# Altium PCB ESP_Layout_2.0.PcbDoc
Units mil, origin at the board's own origin, x right, y up, seen from the top; angles counter-clockwise.
Board outline 3640 x 2300 mil, 2 copper layers (Top Layer, Bottom Layer); 39 components, 25 nets, 166 pads, 23 vias.
Unrouted connection lines stored in the file: 41.
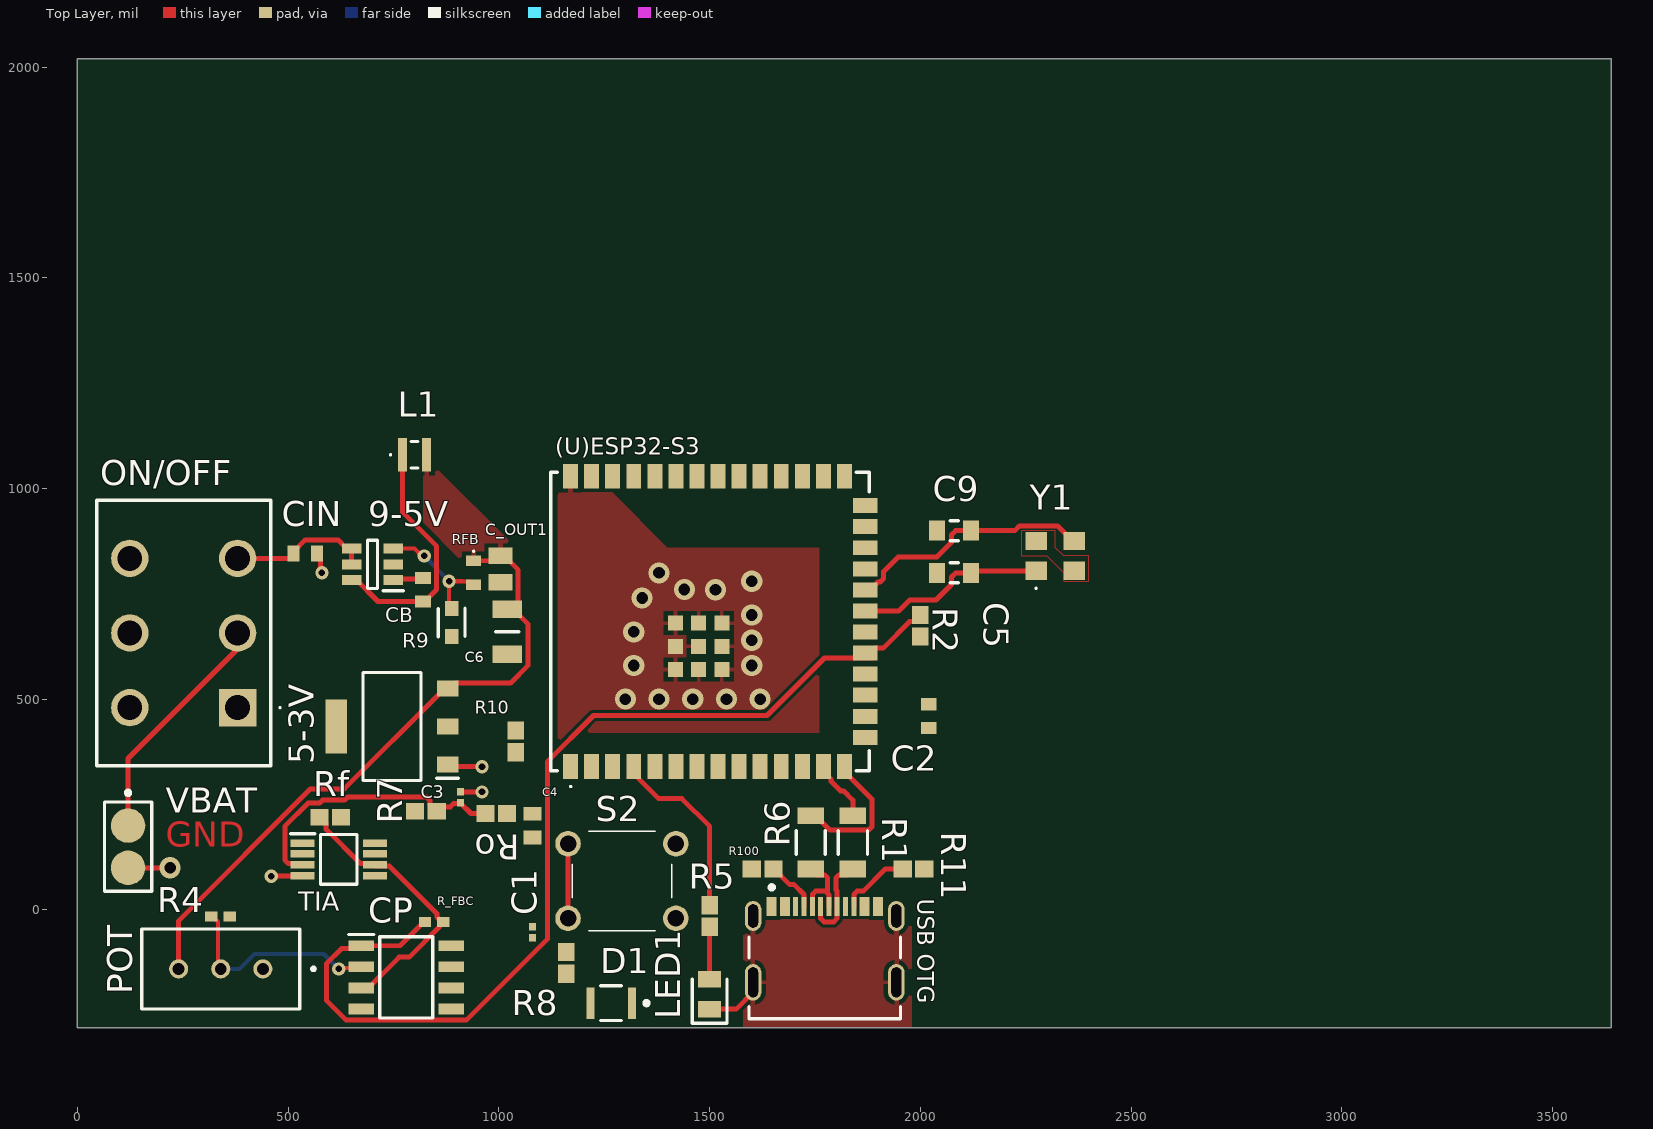
[diagram p0: Top Layer view]
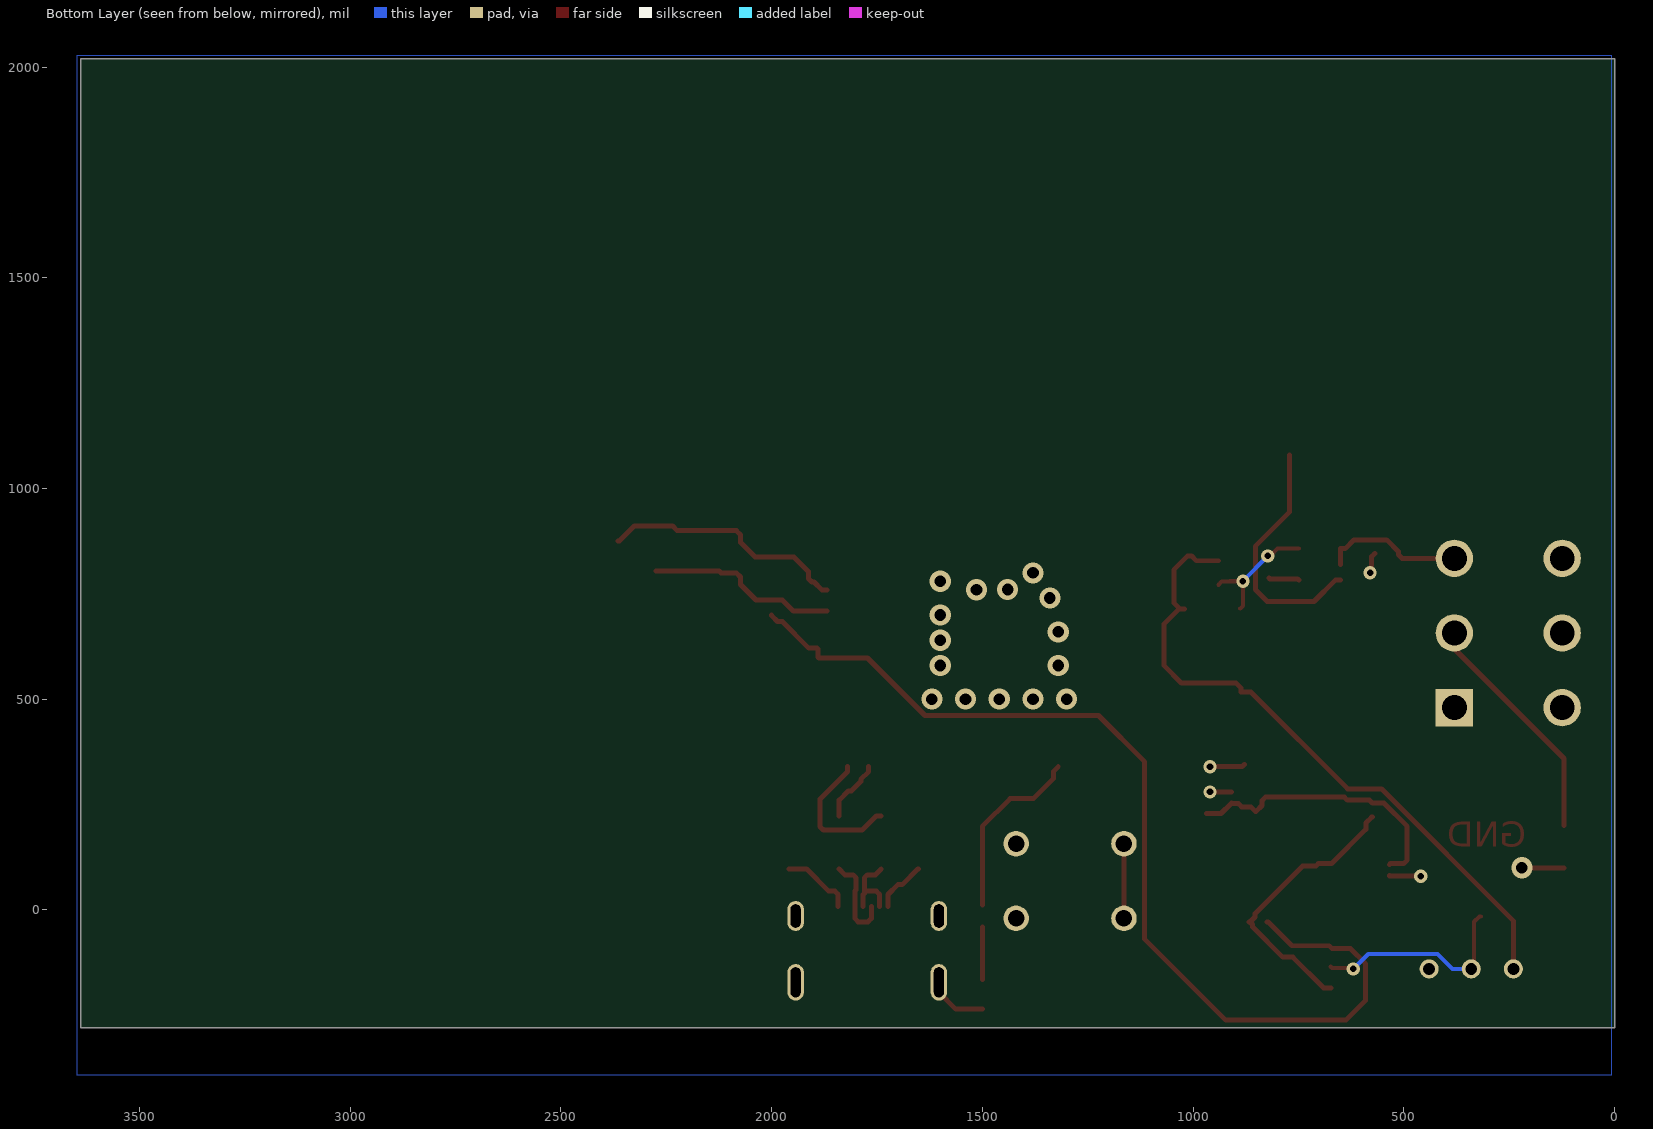
[diagram p1: Bottom Layer view, seen from below]
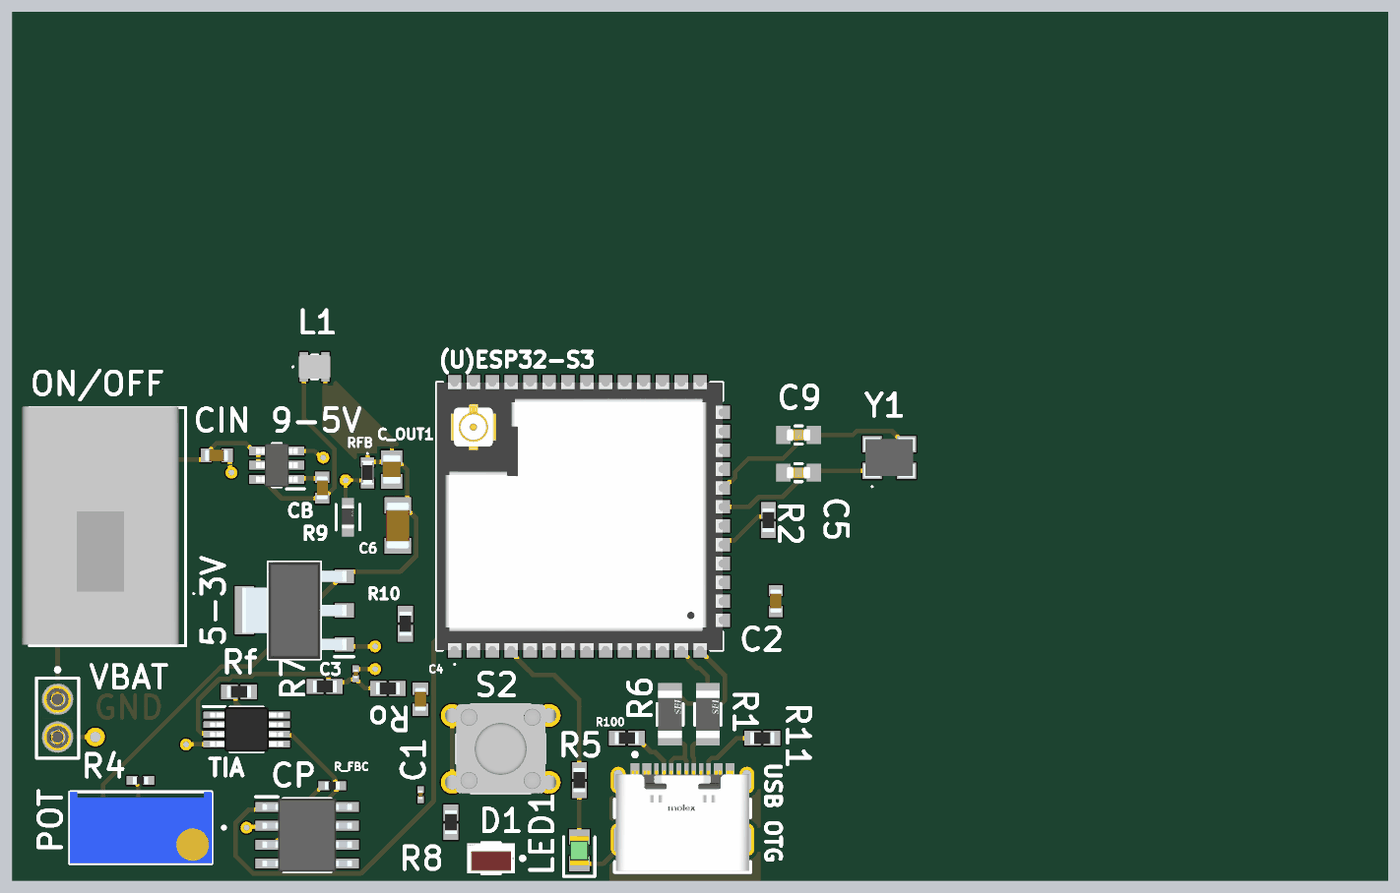
[diagram p2: 3D render of the assembled board from above, using the file's embedded part models]

## Layer stack, top to bottom
Top Solder: solder mask 0.4, Solder Resist, Dk 3.5
Top Layer: signal copper 1.4
Dielectric 1: dielectric 12.6, FR-4, Dk 4.8
Bottom Layer: signal copper 1.4
Bottom Solder: solder mask 0.4, Solder Resist, Dk 3.5

## Board outline
0,-280 0,2020 3640,2020 3640,-280

## Design rules (kind name [scope] priority, off if disabled: settings)
Clearance [All] p1: gap=7.87 ignorepadtopadclearanceinfootprint=FALSE
DiffPairsRouting [All] p1: maxlimit=10 minlimit=5.91 mostfreqgap=10 toplayer_minwidth=5.91 toplayer_maxwidth=19.68 toplayer_prefwidth=15 bottomlayer_mingap=5.91 bottomlayer_minwidth=5.91 bottomlayer_maxwidth=19.68 bottomlayer_prefwidth=15 maxuncoupledlength=500
HoleSize [All] p1: absolutevalues=TRUE maxlimit=196.85 minlimit=11.81 maxpercent=80.000 minpercent=20.000
MinimumSolderMaskSliver [All] p1: minsoldermaskwidth=4
PolygonConnect [All] p1: thpad.connectstyle=Relief thpad.reliefconductorwidth=10 thpad.reliefentries=4 thpad.polygonreliefangle="90 Angle" thpad.airgapwidth=10 smdpad.connectstyle=Relief smdpad.reliefconductorwidth=10 smdpad.reliefentries=4 smdpad.polygonreliefangle="90 Angle" smdpad.airgapwidth=10 via.connectstyle=Direct via.reliefconductorwidth=10 via.reliefentries=4 via.polygonreliefangle="90 Angle" via.airgapwidth=10
RoutingVias [All] p1: holewidth=15.75 width=31.5 viastyle="Through Hole" minholewidth=11.81 minwidth=27.56 maxholewidth=27.56 maxwidth=39.37
SilkToSolderMaskClearance [IsPad] p1: minsilkscreentomaskgap=5.91 clearancetoexposedcopper=TRUE
SolderMaskExpansion [All] p1: expansion=4 istentingtop=FALSE
SupplyNets "Schematic Supply Nets_4" [InNet('GND')] p1: voltage=0.000
SupplyNets "Schematic Supply Nets_3" [InNet('5V_CLEAN')] p2: voltage=0.000
SupplyNets "Schematic Supply Nets_2" [InNet('VBAT_SW')] p3: voltage=0.000
SupplyNets "Schematic Supply Nets_1" [InNet('3V3_CLEAN')] p4: voltage=0.000
SupplyNets "Schematic Supply Nets" [InNet('VBAT')] p5: voltage=0.000
Width [All] p1: maxlimit=39.37 minlimit=7.87 preferedwidth=11.81
26 further rules are at their usual default settings.

## Classes and differential pairs
component class V_Reg: 5-3V 9-5V C4 C6 C_OUT1 CB CIN L1 ON/OFF R9 RFB VBAT
component class Receiver: C1 C3 CP D1 pot R2 R4 R7 R_FBC Rf Ro TIA
component class ESP: (U)ESP32-S3 C2 C5 C9 LED1 R1 R5 R6 R8 R10 R11 R100 "USB OTG" Y1
differential pair USB: +USB_P -USB_N

## Components (designator, comment, footprint, x,y, rotation, side; value= is the part's Value field where it differs from the comment)
5-3V "AMS1117-3.3" SOT229P700X180-4N 746.34,435.29 r180 top (schematic designator IC3)
9-5V "LMR50410Y5FQDBVRQ1" SOT95P280X145-6N 700,820 r180 top (schematic designator IC2)
(U)ESP32-S3 "ESP32-S3-WROOM-1U-N8R8" ESP32S3WROOM1UN8R8 1501.1,684.49 r90 top (schematic designator IC1)
C1 "0.1uF" CAPC0603X33N 1080,-52.99 r270 top
C2 "1uF" CAPC1608X90N 2020,460 r270 top
C3 "0.1uF" CAPC0603X33N 908.9,267.28 r270 top
C4 "22uF" CAPC1608X105N 1080,200 r90 top
C5 "8pF" FP-CGA3E-0_3-0_1-IPC_A 2080,800 r180 top
C6 "10uF" CAPC3216X180N 1020,660 r90 top
C9 "8pF" FP-CGA3E-0_3-0_1-IPC_A 2080,900 r180 top
C_OUT1 "10uF" CAPC2012X140N 1003.87,808.75 r270 top (schematic designator C_CLEAN)
CB "0.1uF" CAPC1608X90N 820,760 r270 top
CIN "2.2uF" CAPC1608X90N 540.65,845.86 r0 top
CP "LM393DR2GH" SOIC127P600X175-8N 780,-160 r0 top (schematic designator IC4)
D1 "SFH 2713" FP-SFH_2713-MFG 1266.52,-221.16 r180 top
L1 "4.7uF" 621767970 800,1080 r0 top
LED1 "LTST-C170GKT" LEDC2012X120N 1500,-200 r90 top
ON/OFF "SLW-1678105-6A-N-D" SLW16781056AND 380,480 r90 top (schematic designator S1)
POT "3296W-1-104LF" 3296W1503LF 440,-140 r0 top (schematic designator VR1)
R1 "RMCF1206ZT0R00" FP-RMCF1206-MFG 1840,160 r90 top
R2 "10k" RESC1608X55N 2000,674.41 r270 top
R4 "100k" RESC1005X40N 339.3,-15.37 r0 top
R5 "130Ω" RESC1608X55N 1500,-14.41 r90 top
R6 "RMCF1206ZT0R00" FP-RMCF1206-MFG 1740,160 r90 top
R7 "10k" RESC1608X55N 826.79,234.05 r0 top
R8 "10kΩ" RESC1608X55N 1160,-125.59 r270 top
R9 "22.1kΩ" FP-RT0603-MFG 887.94,682 r90 top value=22.1KΩ
R10 "10kΩ" RESC1608X55N 1040,400 r90 top
R11 "5.1kΩ" RESC1608X55N 1984.03,97.07 r0 top
R100 "5.1kΩ" RESC1608X55N 1625.72,97.07 r180 top
R_FBC "100k" RESC1005X40N 846.28,-28.68 r180 top
Rf "10k" RESC1608X55N 600,220 r180 top (schematic designator R3)
RFB "88.7kΩ" ERA3AEB101V 940,800 r270 top (schematic designator R_FBT)
Ro "10k" RESC1608X55N 993.69,228.77 r0 top (schematic designator R5.1)
S2 "RST_SW" 18259106 1164.09,157.17 r0 top
TIA "OPA380AIDGKR" SOP65P490X110-8N 620,120 r0 top (schematic designator U1)
"USB OTG" "217179-0001" FP-2171790001-MFG 1773.17,-126.57 r0 top
VBAT "837-22-002-30-001101" FP-837-22-002-30-001101-MFG 120,150 r270 top
Y1 "ECS-80-8-33Q-ADS" ECS80833QADS 2320,840 r0 top

## Footprints (in the part's own frame and the unit in brackets; to place one, negate y for a bottom-side part, rotate by r counter-clockwise, add the part's x,y. Pads: shape width x height; smd on the part's side, far side on the other; paste and mask are expansions set on the pad)
3296W1503LF [mm]
  round 1.15 hole 0.71: 1(0,0) 2(-2.54,0) 3(-5.08,0)
  silkscreen extent -7.3,-2.42 3.15,2.41, body extent -7.3,-2.41 2.22,2.41, height 11.54
18259106 [mm]
  round 1.54 hole 0.99: 1(0,0) 2(6.5,0) 3(0,-4.5) 4(6.5,-4.5)
  silkscreen extent 0.25,-5.25 6.25,0.75, body extent -0.65,-5.25 7.15,0.74, height 5.64
621767970 [mm]
  rect 0.55x2 smd: 1(-0.725,0) 2(0.725,0)
  silkscreen extent -1.5,-0.8 0.2,0.8, body extent -1.05,-0.8 1.05,0.8, height 1.1
CAPC0603X33N [mm]
  rect 0.46x0.42 smd: 1(-0.33,0) 2(0.33,0)
  body extent -0.3,-0.15 0.3,0.15, height 0.33
CAPC1608X90N [mm]
  rect 0.73x0.94 smd: 1(-0.71,0) 2(0.71,0)
  body extent -0.8,-0.4 0.8,0.4, height 0.9
CAPC1608X105N [mm]
  rect 0.83x1.07 smd: 1(-0.72,0) 2(0.72,0)
  body extent -0.8,-0.4 0.8,0.4, height 1.05
CAPC2012X140N [mm]
  rect 0.98x1.43 smd: 1(-0.8,0) 2(0.8,0)
  body extent -1,-0.63 1,0.63, height 1.4
CAPC3216X180N [mm]
  rect 1.07x1.78 smd: 1(-1.36,0) 2(1.36,0)
  silkscreen extent 0,-0.7 0,0.7, body extent -1.6,-0.8 1.6,0.8, height 1.8
ECS80833QADS [mm]
  rect 1.3x1.1 smd: 1(-1.15,-0.9) 2(1.15,-0.9) 3(1.15,0.9) 4(-1.15,0.9)
  silkscreen extent -1.2,-2 -1.1,-1.9, body extent -1.69,-1.34 1.69,1.34, height 0.9
ERA3AEB101V [mm]
  rect 0.65x0.9 smd: 1(-0.725,0) 2(0.725,0)
  silkscreen extent -1.35,-0.05 -1.25,0.05, body extent -0.8,-0.4 0.8,0.4, height 0.45
ESP32S3WROOM1UN8R8 [mm]
  rect 1.5x0.9 smd: 1(-8.75,8.41) 2(-8.75,7.14) 3(-8.75,5.87) 4(-8.75,4.6) 5(-8.75,3.33) 6(-8.75,2.06) 7(-8.75,0.79) 8(-8.75,-0.48) 9(-8.75,-1.75) 10(-8.75,-3.02) 11(-8.75,-4.29) 12(-8.75,-5.56) 13(-8.75,-6.83) 14(-8.75,-8.1) 27(8.75,-8.1) 28(8.75,-6.83) 29(8.75,-5.56) 30(8.75,-4.29) 31(8.75,-3.02) 32(8.75,-1.75) 33(8.75,-0.48) 34(8.75,0.79) 35(8.75,2.06) 36(8.75,3.33) 37(8.75,4.6) 38(8.75,5.87) 39(8.75,7.14) 40(8.75,8.41)
  rect 0.9x1.5 smd: 15(-6.985,-9.35) 16(-5.715,-9.35) 17(-4.445,-9.35) 18(-3.175,-9.35) 19(-1.905,-9.35) 20(-0.635,-9.35) 21(0.635,-9.35) 22(1.905,-9.35) 23(3.175,-9.35) 24(4.445,-9.35) 25(5.715,-9.35) 26(6.985,-9.35)
  rect 0.9x0.9 smd: 41(-1.5,0.69) 42(-2.9,2.09) 43(-2.9,0.69) 44(-2.9,-0.71) 45(-1.5,-0.71) 46(-0.1,-0.71) 47(-0.1,0.69) 48(-0.1,2.09) 49(-1.5,2.09)
  silkscreen extent -10,-9.6 9,9.6, body extent -9.01,-9.61 9.01,9.6, height 3.25
FP-837-22-002-30-001101-MFG [mm]
  round 2.08 smd paste+0 mask+0: 1(-1.27,0) 2(1.27,0)
  silkscreen extent -3.37,-1.42 2.69,1.42, body extent -2.64,-1.37 2.64,1.37, height 0.25
FP-2171790001-MFG [mm]
  rrect100% 1x1.8 hole 1.4 slot 0.6 at 0 deg paste-2539.97 mask+0: 1(-4.32,2.85) 2(4.32,2.85)
  rrect100% 1x2.2 hole 1.8 slot 0.6 at 0 deg paste-2539.97 mask+0: 3(-4.32,-1.15) 4(4.32,-1.15)
  rect 0.6x1.15 smd paste+0 mask+0: A1-B12(-3.2,3.425) A4-B9(-2.4,3.425) B1-A12(3.2,3.425) B4-A9(2.4,3.425)
  rect 0.3x1.15 smd paste+0 mask+0: A5(-1.25,3.425) A6(-0.25,3.425) A7(0.25,3.425) A8(1.25,3.425) B5(1.75,3.425) B6(0.75,3.425) B7(-0.75,3.425) B8(-1.75,3.425)
  silkscreen extent -4.57,-3.35 4.57,4.7, body extent -4.92,-3.45 4.92,4.1, height 0.25
FP-CGA3E-0_3-0_1-IPC_A [mm]
  rect 0.956x1.206 smd paste+0 mask+0: 1(-1.025,0) 2(1.025,0)
  silkscreen extent -0.25,-0.6 0.25,0.6, body extent -2,-1.1 2,1.1, height 0.25
FP-RMCF1206-MFG [mm]
  rect 1x1.6 smd paste+0 mask+0: 1(-1.6,0) 2(1.6,0)
  silkscreen extent -0.72,-0.87 0.72,0.87, body extent -2.2,-0.97 2.2,0.97, height 0.25
FP-RT0603-MFG [mm]
  rect 0.9x0.8 smd paste+0 mask+0: 1(-0.85,0) 2(0.85,0)
  silkscreen extent -0.85,-0.81 0.86,0.8, body extent -1.4,-0.55 1.4,0.55, height 0.25
FP-SFH_2713-MFG [mm]
  rect 0.5x1.9 smd paste-1000 mask+0: 1(-1.25,0) 2(1.25,0)
  silkscreen extent -2.25,-1.05 0.63,1.05, body extent -1.75,-1.15 1.75,1.15, height 0.25
LEDC2012X120N [mm]
  rect 1x1.4 smd: 1(-0.9,0) 2(0.9,0)
  silkscreen extent -1.75,-1.05 0.9,1.05, body extent -1.03,-0.63 0.97,0.63, height 1.2
RESC1005X40N [mm]
  rect 0.75x0.6 smd: 1(-0.55,0) 2(0.55,0)
  body extent -0.5,-0.25 0.5,0.25, height 0.4
RESC1608X55N [mm]
  rect 1.1x1 smd: 1(-0.65,0) 2(0.65,0)
  body extent -0.8,-0.4 0.8,0.4, height 0.55
SLW16781056AND [mm]
  rect 2.25x2.25 hole 1.5: 1(0,0)
  round 2.25 hole 1.5: 2(4.5,0) 3(9,0) 4(9,6.5) 5(4.5,6.5) 6(0,6.5)
  silkscreen extent -3.5,-2.6 12.5,8.5, body extent -3.43,-1.52 12.57,8.98, height 13.82
SOIC127P600X175-8N [mm]
  rect 1.525x0.65 smd: 1(-2.712,1.905) 2(-2.712,0.635) 3(-2.712,-0.635) 4(-2.712,-1.905) 5(2.712,-1.905) 6(2.712,-0.635) 7(2.712,0.635) 8(2.712,1.905)
  silkscreen extent -3.47,-2.45 1.6,2.58, body extent -3,-2.45 3,2.45, height 1.75
SOP65P490X110-8N [mm]
  rect 1.45x0.45 smd: 1(-2.175,0.975) 2(-2.175,0.325) 3(-2.175,-0.325) 4(-2.175,-0.975) 5(2.175,-0.975) 6(2.175,-0.325) 7(2.175,0.325) 8(2.175,0.975)
  silkscreen extent -2.9,-1.5 1.1,1.55, body extent -2.45,-1.5 2.45,1.5, height 1.1
SOT95P280X145-6N [mm]
  rect 1.2x0.6 smd: 1(-1.25,0.95) 2(-1.25,0) 3(-1.25,-0.95) 4(1.25,-0.95) 5(1.25,0) 6(1.25,0.95)
  silkscreen extent -1.85,-1.45 0.3,1.6, body extent -1.4,-1.45 1.4,1.45, height 1.2
SOT229P700X180-4N [mm]
  rect 1.3x0.95 smd: 1(-3.35,2.29) 2(-3.35,0) 3(-3.35,-2.29)
  rect 1.3x3.25 smd: 4(3.35,0)
  silkscreen extent -4,-3.25 1.75,3.25, body extent -3.5,-3.25 3.5,3.25, height 1.8

## Part data
5-3V: "Integrated Circuit", Manufacturer_Name="Advanced Monolithic Systems", Datasheet Link=http://www.advanced-monolithic.com/pdf/ds1117.pdf, Height=1.8mm, Manufacturer_Part_Number=AMS1117-3.3
9-5V: "Integrated Circuit", Manufacturer_Name="Texas Instruments", Mouser Part Number=595-R50410Y5FQDBVRQ1, Arrow Part Number=LMR50410Y5FQDBVRQ1, Arrow Price/Stock=https://www.arrow.com/en/products/lmr50410y5fqdbvrq1/texas-instruments?utm_currency=USD&region=nac, Datasheet Link=https://www.ti.com/lit/ds/symlink/lmr50410-q1.pdf, Height=1.45mm, Manufacturer_Part_Number=LMR50410Y5FQDBVRQ1, Mouser Price/Stock=https://www.mouser.co.uk/ProductDetail/Texas-Instruments/LMR50410Y5FQDBVRQ1?qs=81r%252BiQLm7BR57cLsTbTr9w%3D%3D
(U)ESP32-S3: "Integrated Circuit", Manufacturer_Name="Espressif Systems", Mouser Part Number=356-ESP32S3WRM1UN8R8, Datasheet Link=https://www.espressif.com/sites/default/files/documentation/esp32-s3-wroom-1_wroom-1u_datasheet_en.pdf, Height=3.35mm, Manufacturer_Part_Number=ESP32-S3-WROOM-1U-N8R8, Mouser Price/Stock=https://www.mouser.co.uk/ProductDetail/Espressif-Systems/ESP32-S3-WROOM-1U-N8R8?qs=Li%252BoUPsLEnvOglIa3CypaQ%3D%3D
C1 C3: library part GRM033C71C104KE14D, "Capacitor", Manufacturer_Name="Murata Electronics", Mouser Part Number=81-GRM33C71C104KE14D, Arrow Part Number=GRM033C71C104KE14D, Arrow Price/Stock=https://www.arrow.com/en/products/grm033c71c104ke14d/murata-manufacturing?region=nac, Datasheet Link=https://search.murata.co.jp/Ceramy/image/img/A01X/G101/ENG/GRM033C71C104KE14-01A.pdf, Height=0.33mm, Manufacturer_Part_Number=GRM033C71C104KE14D, Mouser Price/Stock=https://www.mouser.co.uk/ProductDetail/Murata-Electronics/GRM033C71C104KE14D?qs=P%2FC4Eoq9CDzkjc0H6wJP9A%3D%3D
C2: library part CL10B105KP8NNNC, "Capacitor", Manufacturer_Name=SAMSUNG, Mouser Part Number=187-CL10B105KP8NNNC, Arrow Part Number=CL10B105KP8NNNC, Arrow Price/Stock=https://www.arrow.com/en/products/cl10b105kp8nnnc/samsung-electro-mechanics?utm_currency=USD&region=nac, Datasheet Link=https://media.digikey.com/pdf/Data%20Sheets/Samsung%20PDFs/CL_Series_MLCC_ds.pdf, Height=0.9mm, Manufacturer_Part_Number=CL10B105KP8NNNC, Mouser Price/Stock=https://www.mouser.co.uk/ProductDetail/Samsung-Electro-Mechanics/CL10B105KP8NNNC?qs=X6jEic%2FHinD9krOsbkFZow%3D%3D
C4: library part CL10A226MP8NUNE, "Capacitor", Manufacturer_Name=SAMSUNG, Mouser Part Number=187-CL10A226MP8NUNE, Arrow Part Number=CL10A226MP8NUNE, Arrow Price/Stock=https://www.arrow.com/en/products/cl10a226mp8nune/samsung-electro-mechanics?utm_currency=USD&region=europe, Datasheet Link=https://datasheet.datasheetarchive.com/originals/distributors/Datasheets-DGA10/2407063.pdf, Height=1.05mm, Manufacturer_Part_Number=CL10A226MP8NUNE, Mouser Price/Stock=https://www.mouser.co.uk/ProductDetail/Samsung-Electro-Mechanics/CL10A226MP8NUNE?qs=gRKWieUq2Hb5O0PTfRKzDQ%3D%3D
C5 C9: library part CMP-08246-000516-1, "Cap Ceramic 8pF 50V C0G 0.5pF Pad SMD 0603 +125°C Automotive T/R", Case Code (Imperial)=0603, Case Code (Metric)=1608, Dielectric=C0G, Max Operating Temperature=125°C, Min Operating Temperature=-55°C, Package Quantity=4000, Ratings=AEC-Q200, Voltage Rating=50V, Capacitance=8pF, Case/Package=0603, Composition=Ceramic, Depth=0.8mm, Height=0.8mm, Length=1.6mm, Mount="Surface Mount", Packaging="Tape and Reel", Radiation Hardening=No, REACH SVHC="No SVHC", Termination=SMD/SMT, Thickness=0.035inch, Voltage Rating (DC)=50V, Weight=7.1E-05oz, Width=0.031inch
C6: library part CL31B106KAHNNNE, "Capacitor", Manufacturer_Name=SAMSUNG, Mouser Part Number=187-CL31B106KAHNNNE, Arrow Part Number=CL31B106KAHNNNE, Arrow Price/Stock=https://www.arrow.com/en/products/cl31b106kahnnne/samsung-electro-mechanics?utm_currency=USD&region=europe, Datasheet Link=https://datasheet.datasheetarchive.com/originals/distributors/Datasheets_SAMA/d94547340e0e9d2be5f415b64e4e2f0a.pdf, Height=1.8mm, Manufacturer_Part_Number=CL31B106KAHNNNE, Mouser Price/Stock=https://www.mouser.co.uk/ProductDetail/Samsung-Electro-Mechanics/CL31B106KAHNNNE?qs=349EhDEZ59r5EZhnLOTsYA%3D%3D
C_OUT1: library part CL21B106KOQNNNE, "Capacitor", Manufacturer_Name=SAMSUNG, Mouser Part Number=187-CL21B106KOQNNNE, Arrow Part Number=CL21B106KOQNNNE, Arrow Price/Stock=https://www.arrow.com/en/products/cl21b106koqnnne/samsung-electro-mechanics?utm_currency=USD&region=europe, Datasheet Link=https://datasheet.datasheetarchive.com/originals/distributors/Datasheets_SAMA/a6a503886ec2e900bbf4e5d6e2f8e8b0.pdf, Height=1.4mm, Manufacturer_Part_Number=CL21B106KOQNNNE, Mouser Price/Stock=https://www.mouser.co.uk/ProductDetail/Samsung-Electro-Mechanics/CL21B106KOQNNNE?qs=349EhDEZ59r8qgLddyW2Yw%3D%3D
CB: library part CC0603KRX7R7BB104, "Capacitor", Manufacturer_Name=YAGEO, Mouser Part Number=603-CC603KRX7R7BB104, Arrow Part Number=CC0603KRX7R7BB104, Arrow Price/Stock=https://www.arrow.com/en/products/cc0603krx7r7bb104/yageo?utm_currency=USD&region=europe, Datasheet Link=https://www.yageo.com/en/Chart/Download/pdf/CC0603KRX7R7BB104, Height=0.9mm, Manufacturer_Part_Number=CC0603KRX7R7BB104, Mouser Price/Stock=https://www.mouser.co.uk/ProductDetail/YAGEO/CC0603KRX7R7BB104?qs=AgBp2OyFlx8KPmNTlFoWXA%3D%3D
CIN: library part CL10A225KO8NNNC, "Capacitor", Manufacturer_Name=SAMSUNG, Mouser Part Number=187-CL10A225KO8NNNC, Arrow Part Number=CL10A225KO8NNNC, Arrow Price/Stock=https://www.arrow.com/en/products/cl10a225ko8nnnc/samsung-electro-mechanics?region=europe, Datasheet Link=https://lcsc.componentsearchengine.com/Datasheets/2/CL10A225KO8NNNC.pdf, Height=0.9mm, Manufacturer_Part_Number=CL10A225KO8NNNC, Mouser Price/Stock=https://www.mouser.co.uk/ProductDetail/Samsung-Electro-Mechanics/CL10A225KO8NNNC?qs=hqM3L16%252BxlecoJxUp5hKOw%3D%3D
CP: "Integrated Circuit", Manufacturer_Name=onsemi, Mouser Part Number=863-LM393DR2GH, Arrow Part Number=LM393DR2GH, Arrow Price/Stock=https://www.arrow.com/en/products/lm393dr2gh/on-semiconductor?region=nac, Datasheet Link=https://www.arrow.com/en/products/lm393dr2gh/on-semiconductor, Height=1.75mm, Manufacturer_Part_Number=LM393DR2GH, Mouser Price/Stock=https://www.mouser.co.uk/ProductDetail/onsemi/LM393DR2GH?qs=VZGfJwuufXYqyz8qorfXHA%3D%3D
D1: library part CMP-62027-000005-1, "Photodiodes Silicon PIN Photodiode 635 nm"
L1: library part 7-2176797-1, "Inductor", Manufacturer_Name="TE Connectivity", Datasheet Link=https://www.te.com/commerce/DocumentDelivery/DDEController?Action=srchrtrv&DocNm=1773151-4&DocType=Data%20Sheet&DocLang=English&DocFormat=pdf&PartCntxt=2176797-45, Height=1mm, Manufacturer_Part_Number=7-2176797-1
LED1: "LED", Manufacturer_Name=Lite-On, Mouser Part Number=859-LTST-C170GKT, Arrow Part Number=LTST-C170GKT, Arrow Price/Stock=https://www.arrow.com/en/products/ltst-c170gkt/lite-on-technology?utm_currency=USD&region=europe, Datasheet Link=https://mm.digikey.com/Volume0/opasdata/d220001/medias/docus/895/LTST-C170GKT.pdf, Height=1.2mm, Manufacturer_Part_Number=LTST-C170GKT, Mouser Price/Stock=https://www.mouser.co.uk/ProductDetail/LITEON/LTST-C170GKT?qs=%2FSqKn2EfXQSV5aRij3YIfQ%3D%3D
ON/OFF: "Switch", Manufacturer_Name="Same Sky", Mouser Part Number=179-SLW16781056AND, Arrow Part Number=SLW-1678105-6A-N-D, Arrow Price/Stock=https://www.arrow.com/en/products/slw-1678105-6a-n-d/cui-devices?utm_currency=USD&region=nac, Datasheet Link=https://www.sameskydevices.com/product/resource/SLW-1678105-6A-N-D.pdf, Height=14.5mm, Manufacturer_Part_Number=SLW-1678105-6A-N-D, Mouser Price/Stock=https://www.mouser.co.uk/ProductDetail/Same-Sky/SLW-1678105-6A-N-D?qs=IKkN%2F947nfCWfuHPg7jcWw%3D%3D
POT: "Variable Resistor", Manufacturer_Name=Bourns, Mouser Part Number=652-3296W-1-104LF, Arrow Part Number=3296W-1-104LF, Arrow Price/Stock=https://www.arrow.com/en/products/3296w-1-104lf/bourns?utm_currency=USD&region=europe, Datasheet Link=https://datasheet.datasheetarchive.com/originals/distributors/Datasheets-10/DSA-187647.pdf, Height=10.28mm, Manufacturer_Part_Number=3296W-1-104LF, Mouser Price/Stock=https://www.mouser.co.uk/ProductDetail/Bourns/3296W-1-104LF?qs=NxuKWO2Bm4Yv9t2iisRb6w%3D%3D
R1 R6: library part CMP-26527-005649-1, "0Ω ±0 0.25W 1206 Thick Film Chip Resistor AEC-Q200 compliant", Case Code (Imperial)=1206, Case Code (Metric)=3216, Current Rating=2A, Max Operating Temperature=155°C, Max Power Dissipation=250mW, Min Operating Temperature=-55°C, Resistance=0R, Resistor Type="Thick Film", Working Voltage=200V, Case/Package=1206, Construction=Rectangular, Contact Plating=Tin, Depth=1.6mm, Features="Automotive AEC-Q200", Height=0.028inch, Lead Free="Lead Free", Length=0.126inch, Military Standard=Not, Mount="Surface Mount", Number of Terminations=2, Packaging="Tape and Reel", Power Rating=250mW, Radiation Hardening=No, RoHS Compliant=Yes, Series=RMCF, Technology="THICK FILM", Width=0.063inch
R2 R7 R8 R10 Rf Ro: library part RC0603FR0710KL, "Resistor", Manufacturer_Name=KEMET, Arrow Part Number=RC0603FR0710KL, Arrow Price/Stock=https://www.arrow.com/en/products/rc0603fr-0710kl/yageo, Datasheet Link=http://www.yageo.com/documents/recent/PYu-RC0603_51_RoHS_L_v5.pdf, Height=0.55mm, Manufacturer_Part_Number=RC0603FR0710KL
R4 R_FBC: library part R0402_1%_100_K__RC0402FR-07100KL_, "Resistor", Manufacturer_Name=YAGEO, Manufacturer_Part_Number="R0402 1% 100 K (RC0402FR-07100KL)", Datasheet Link=https://www.yageo.com/upload/media/product/products/datasheet/rchip/PYu-RC_Group_51_RoHS_L_12.pdf, Height=0.4mm
R5: library part RC0603FR-07130RL, "Resistor", Manufacturer_Name=YAGEO, Datasheet Link=https://www.mouser.com/catalog/specsheets/YAGEO_PYu_RC_Group_51_RoHS_L_12.pdf, Height=0.55mm, Manufacturer_Part_Number=RC0603FR-07130RL
R9: library part CMP-2000-04404-2, "RES 22.1K OHM 1/10W .1% SMD 0603", Manufacturer=Yageo, Manufacturer Part Number=RT0603BRD0722K1L, Package=RT0603, Power Rating=0.1W, Resistance=22.1KΩ, Temperature="-55°C to +155°C", Temperature Coefficient="25 ppm/°C", Temperature Range High=+155°C, Temperature Range Low=-55°C, Tolerance=0.001, Voltage Rating=75V, Automotive=No, Category=Res, ComponentLink2Description=Datasheet, ComponentLink2URL=http://www.yageo.com/documents/recent/PYu-RT_1-to-0.01_RoHS_L_9.pdf, Composition="Thin Film", Device Class L1="Passive Components", Device Class L2=Resistors, Device Class L3="Chip SMD Resistors", Digikey Description="RES 22.1K OHM 1/10W .1% SMD 0603", Footprint Url=http://www.yageo.com/exep/pages/download/literatures/PYu-R_Mount_10.pdf, Height=0.55mm, Ipc Land Pattern Name=RESC16080X45, Lead Free=Yes, Mouser Description="Res Thin Film 0603 22.1K Ohm 0.1% 1/10W ±25ppm/°C SMD Paper T/R", Octopart=https://octopart.com/rt0603brd0722k1l-yageo-1430878, RoHS=TRUE, Series=RT
R11 R100: library part RC0603FR-075K1L, "Resistor", Manufacturer_Name=KEMET, Mouser Part Number=603-RC0603FR-075K1L, Arrow Part Number=RC0603FR-075K1L, Arrow Price/Stock=https://www.arrow.com/en/products/rc0603fr-075k1l/yageo?region=nac, Datasheet Link=http://www.yageo.com/documents/recent/PYu-RC0603_51_RoHS_L_v5.pdf, Height=0.55mm, Manufacturer_Part_Number=RC0603FR-075K1L, Mouser Price/Stock=https://www.mouser.co.uk/ProductDetail/YAGEO/RC0603FR-075K1L?qs=gt6vzsuosg2jUUwxnI2PJQ%3D%3D
RFB: library part ERA-3AEB8872V, "Resistor", Manufacturer_Name=Panasonic, Mouser Part Number=667-ERA-3AEB8872V, Arrow Part Number=ERA-3AEB8872V, Arrow Price/Stock=https://www.arrow.com/en/products/era-3aeb8872v/panasonic?region=nac, Datasheet Link=https://industrial.panasonic.com/cdbs/www-data/pdf/RDM0000/AOA0000C307.pdf, Height=0.55mm, Manufacturer_Part_Number=ERA-3AEB8872V, Mouser Price/Stock=https://www.mouser.co.uk/ProductDetail/Panasonic/ERA-3AEB8872V?qs=nuXzIS8loXExOdAoV6n39Q%3D%3D
S2: library part 1825910-6, "Switch", Manufacturer_Name="TE Connectivity", Mouser Part Number=650-1825910-6, Arrow Part Number=1825910-6, Arrow Price/Stock=https://www.arrow.com/en/products/1825910-6/te-connectivity?utm_currency=USD&region=europe, Datasheet Link=https://www.te.com/commerce/DocumentDelivery/DDEController?Action=srchrtrv&DocNm=1308111-1_SWITCHES_CORE_PROGRAM_CATALOG&DocType=Catalog%20Section&DocLang=English&PartCntxt=1825910-6&DocFormat=pdf, Height=5.3mm, Manufacturer_Part_Number=1825910-6, Mouser Price/Stock=https://www.mouser.co.uk/ProductDetail/TE-Connectivity/1825910-6?qs=A6cQTCBcXncisYDS1KbpGA%3D%3D
TIA: "Undefined or Miscellaneous", Manufacturer_Name="Texas Instruments", Mouser Part Number=595-OPA380AIDGKR, Arrow Part Number=OPA380AIDGKR, Arrow Price/Stock=https://www.arrow.com/en/products/opa380aidgkr/texas-instruments?utm_currency=USD&region=europe, Datasheet Link=http://www.ti.com/general/docs/suppproductinfo.tsp?distId=26&gotoUrl=http%3A%2F%2Fwww.ti.com%2Flit%2Fgpn%2Fopa380, Height=1.1mm, Manufacturer_Part_Number=OPA380AIDGKR, Mouser Price/Stock=https://www.mouser.co.uk/ProductDetail/Texas-Instruments/OPA380AIDGKR?qs=7nS3%252BbEUL6se7xvHvUhv0w%3D%3D
"USB OTG": library part CMP-04767-000028-2, "CONN RCP USB2.0 TYP C 24P SMD RA", Current Rating=1.25A, Max Operating Temperature=85°C, Min Operating Temperature=-40°C, Voltage Rating=30V, Contact Material="Gold, Nickel", Gender=Receptacle, Height=3.36mm, NexarPartId=117190526, Number Of Contacts=16, USB Standard="USB 2.0"
VBAT: library part CMP-07791-000013-1, "CONN SPRING PISTON 2POS SMD", Current Rating=2A, Manufacturer=Mill-Max, Voltage Rating=150V, Automotive=No, Category=Conn, ComponentLink2Description=Datasheet, ComponentLink2URL=https://www.mill-max.com/catalog/download/2019-08%3A009.1M.pdf, Conn Gender=Male, Conn Orientation=Vertical, Contact Material=Gold,Nickel, Device Class L1=Connectors, Device Class L2="Headers and Wire Housings", Device Class L3=unset, Digikey Description="CONN SPRING PISTON 2POS SMD", Height=9.63mm, Lead Free=No, Manufacturer Part Number=837-22-002-30-001101, Number Of Contacts=2, Number Of Rows=1, Octopart=https://octopart.com/837-22-002-30-001101-mill-max-76383858, Package=837-22-002-30-001101, Pitch=2.54mm, RoHS=TRUE, Standoff Height=0.41mm
Y1: "Crystal or Oscillator", Manufacturer_Name=ECS, Mouser Part Number=520-ECS-80-8-33Q-ADS, Arrow Part Number=ECS-80-8-33Q-ADS, Arrow Price/Stock=https://www.arrow.com/en/products/ecs-80-8-33q-ads/ecs-international?region=nac, Datasheet Link=https://ecsxtal.com/store/pdf/ECX-33Q.pdf, Height=0.8mm, Manufacturer_Part_Number=ECS-80-8-33Q-ADS, Mouser Price/Stock=https://www.mouser.co.uk/ProductDetail/ECS/ECS-80-8-33Q-ADS?qs=hWgE7mdIu5RnrjF6MxWwaQ%3D%3D

## Via types
v1: diameter 50, hole 28, Top Layer to Bottom Layer, 16 vias
v2: diameter 31.5, hole 15.75, Top Layer to Bottom Layer, 7 vias

## Nets (pads, with @x,y where several pads share a name; then routed paths per layer and width w, separated by ;. In a path a pad name is that pad's centre, name@x,y a point inside that pad or via, vN(x,y) a via of type N, cw(c..) or ccw(c..) an arc to the next point about the centre after c; other vN are vias at no path point)
3V3_CLEAN: 5-3V.2 5-3V.4 (U)ESP32-S3.2 C1.2 C4.2 CP.8 D1.1 R2.2 R8.2 R10.2 Ro.2 TIA.7
5V_CLEAN: 5-3V.3 "USB OTG.A4-B9" "USB OTG.B4-A9" C6.2 C_OUT1.1 L1.2 POT.3 RFB.1 | length 1585.7
  Top Layer w11.81: POT.3 240,-25.74 552.94,287.2 633.08,287.2 863.07,517.18 885.96,517.18 885.96,526.29 897.91,538.25 1027.38,538.25 1068.82,579.69 1068.82,678.7 1033.98,713.54 C6.2 ; RFB.1 992.17,828.54 C_OUT1.1 1012.72,840.24 1045.8,807.17 1045.8,728.7 C6.2@1030.64,713.54
BOOT: (U)ESP32-S3.27 R8.1 S2.1 S2.3 | length 177.2
  Top Layer w11.81: S2.3 S2.1
FB: 9-5V.3 R9.2 RFB.2 | length 294
  Top Layer w10: 9-5V.3 799.54,857.4 816.94,840 v2(822.76,840) ; R9.2 881.81,721.59 v2(881.81,780) 912.56,780 913.31,779.25 932.2,779.25 RFB.2
  Bottom Layer w10: v2(822.76,840) 822.76,839.53 881.81,780.47 v2(881.81,780)
GND: 5-3V.1 9-5V.2 "USB OTG.1" "USB OTG.2" "USB OTG.3" "USB OTG.4" "USB OTG.A1-B12" "USB OTG.B1-A12" (U)ESP32-S3.1 (U)ESP32-S3.40 (U)ESP32-S3.41 (U)ESP32-S3.42 (U)ESP32-S3.43 (U)ESP32-S3.44 (U)ESP32-S3.45 (U)ESP32-S3.46 (U)ESP32-S3.47 (U)ESP32-S3.48 (U)ESP32-S3.49 C1.1 C2.2 C3.1 C4.1 C5.2 C6.1 C9.2 C_OUT1.2 CIN.2 CP.4 CP.5 CP.6 LED1.1 POT.1 R7.1 R9.1 R11.2 R100.2 S2.2 S2.4 TIA.4 VBAT.2 Y1.2 Y1.4 | length 504
  Top Layer w11.81: VBAT.2 v1(220,100) ; v2(460,80) 460.81,80.81 533.56,80.81 TIA.4 ; CIN.2 576.23,838.23 576.23,803.77 v2(580,800) ; 5-3V.1 883.36,340 v2(960,340) ; C3.1 909.04,280.13 959.86,280.13 v2(960,280) ; LED1.1 1563.13,-235.43 1603.09,-195.47 1603.09,-171.85
  other v1: 1300,500 1380,500 1460,500 1540,500 1620,500 1320,580 1600,580 1600,640 1320,660 1600,700 1340,740 1440,760 1513.69,759.81 1600,780 1380,800
NetC2_1: (U)ESP32-S3.3 C2.1 R10.1
NetC3_2: C3.2 R7.2 Ro.1 TIA.3 | length 671.1
  Top Layer w11.81: TIA.3 531.42,110.16 500.12,110.16 492.05,118.23 492.05,198.46 547.05,253.46 574.41,253.46 581.43,260.49 634.07,260.49 641.1,267.51 828.56,267.51 836.63,259.44 836.63,247.83 850.41,234.05 R7.2 862.93,244.6 884.6,244.6 892.22,252.22 906.84,252.22 C3.2 ; C3.2@908.9,253.5 933.64,228.77 Ro.1
NetCB_1: 9-5V.1 CB.1 | length 73
  Top Layer w11.81: 9-5V.1 751.89,785.28 817.32,785.28 CB.1
NetCB_2: 9-5V.6 CB.2 L1.1 | length 587.4
  Top Layer w11.81: 9-5V.6 662.6,782.6 713.15,732.05 CB.2 824.13,732.05 852.28,760.2 852.28,862.95 771.46,943.78 L1.1
NetD1_2: (U)ESP32-S3.7 D1.2 Rf.1 TIA.2
NetIC1_4: (U)ESP32-S3.4 R5.2 | length 435.6
  Top Layer w11.81: 1320,340 1331.81,328.19 1331.81,311.46 1379.17,264.09 1434.17,264.09 1500,198.26 R5.2
NetIC1_13: (U)ESP32-S3.13 R1.2 | length 150.2
  Top Layer w11.81: 1770,340 1770,328.19 1788.5,309.69 1788.5,304.76 1810.69,282.58 1817.81,282.58 1840,260.39 R1.2
NetIC1_14: (U)ESP32-S3.14 R6.2 | length 331.9
  Top Layer w11.81: R6.2 1751.81,222.99 1785.28,189.53 1877.2,189.53 1885.28,197.6 1885.28,262.91 1820,328.19 1820,340
NetIC1_19: (U)ESP32-S3.19 CP.1 R2.1 R4.2 R_FBC.2 | length 2448
  Top Layer w11.81: R_FBC.2 821.68,-28.68 765.35,-85 677.05,-85 670.16,-91.89 626.35,-91.89 590.47,-127.77 590.47,-214.55 637.5,-261.57 922.5,-261.57 1114.84,-69.23 1114.84,351.57 1224.49,461.22 1636.06,461.22 1772.52,597.68 1888.03,597.68 1890.43,600.08 1890.43,618.9 1892.83,621.3 1911.65,621.3 1974.61,684.25 1986.22,684.25 2000,698.03 R2.1
NetIC4_2: CP.2 POT.2 R4.1 | length 500.3
  Top Layer w10: R4.1 320.6,-15.37 333.32,-28.09 333.32,-133.32 POT.2 ; v2(620,-140) 622.5,-137.5 670.73,-137.5 CP.2
  Bottom Layer w10: POT.2 384.37,-140 419.88,-104.49 584.49,-104.49 v2(620,-140)
NetIC4_3: CP.3 R_FBC.1 Rf.2 TIA.6 | length 669.7
  Top Layer w11.81: Rf.2 576.38,220 590.16,206.22 590.16,191.38 671.38,110.16 702.68,110.16 TIA.6 708.58,104.25 739.88,104.25 853.17,-9.04 853.17,-16.87 R_FBC.1@864.98,-28.68 ; CP.3 690.45,-185 763.3,-112.15 787.22,-112.15 859.08,-40.29 859.08,-34.58 R_FBC.1@864.98,-28.68 ; R_FBC.1 R_FBC.1@864.98,-28.68
NetLED1_2: LED1.2 R5.1 | length 124.6
  Top Layer w11.81: LED1.2 R5.1
NetR11_1: "USB OTG.B5" R11.1 | length 169.8
  Top Layer w11.81: 1842.07,8.27 1842.07,36.61 1850.14,44.68 1864.68,44.68 1917.07,97.07 R11.1
NetR100_1: "USB OTG.A5" R100.1 | length 126
  Top Layer w11.81: R100.1 1653.28,97.07 1690.4,59.95 1700.62,59.95 1723.96,36.61 1723.96,8.27
OSC_IN: (U)ESP32-S3.21 C5.1 Y1.1 | length 455.4
  Top Layer w11.81: 1869.21,709.49 1948.66,709.49 1974.61,735.43 2037.13,735.43 2074,772.3 2074,790.18 2083.81,800 C5.1 2124.92,804.57 Y1.1
OSC_OUT: (U)ESP32-S3.22 C9.1 Y1.3 | length 593.7
  Top Layer w11.81: 1869.21,759.49 1881.02,759.49 1899.53,777.99 1904.45,777.99 1912.52,786.06 1912.52,802.8 1947.25,837.52 2039.22,837.52 2074,872.3 2074,890.18 2083.81,900 C9.1 2224.16,900 2235.02,910.87 2325.91,910.87 2361.34,875.43 Y1.3
USB_N: "USB OTG.A7" "USB OTG.B7" R6.1 | length 180.9
  Top Layer w11.81: R6.1 1753.78,83.23 1773.24,83.23 1780.16,76.31 1780.16,39.47 1783.02,36.61 1783.02,8.27 ; 1743.65,8.27 1743.65,36.61 1751.72,44.68 1774.94,44.68
USB_P: "USB OTG.A6" "USB OTG.B6" R1.1 | length 220.7
  Top Layer w11.81: 1763.33,8.27 1763.33,-20.08 1771.4,-28.15 1794.63,-28.15 1802.7,-20.08 1802.7,-8.46 1802.7,8.27 1802.7,44.77 1799.84,47.62 1799.84,76.31 1806.76,83.23 1826.22,83.23 R1.1
VBAT: ON/OFF.2 VBAT.1 | length 558.8
  Top Layer w11.81: VBAT.1 120,359.45 400,639.45 ON/OFF.2@400,642.83
VBAT_SW: 9-5V.4 9-5V.5 CIN.1 ON/OFF.3 | length 339.1
  Top Layer w11.81: ON/OFF.3 504.24,834.33 512.7,842.8 CIN.1 512.7,849.99 540.85,878.14 618.24,878.14 638.98,857.4 9-5V.4 9-5V.5
pads on no net: "USB OTG.A8" "USB OTG.B8" (U)ESP32-S3.5 (U)ESP32-S3.6 (U)ESP32-S3.8 (U)ESP32-S3.9 (U)ESP32-S3.10 (U)ESP32-S3.11 (U)ESP32-S3.12 (U)ESP32-S3.15 (U)ESP32-S3.16 (U)ESP32-S3.17 (U)ESP32-S3.18 (U)ESP32-S3.20 (U)ESP32-S3.23 (U)ESP32-S3.24 (U)ESP32-S3.25 (U)ESP32-S3.26 (U)ESP32-S3.28 (U)ESP32-S3.29 (U)ESP32-S3.30 (U)ESP32-S3.31 (U)ESP32-S3.32 (U)ESP32-S3.33 (U)ESP32-S3.34 (U)ESP32-S3.35 (U)ESP32-S3.36 (U)ESP32-S3.37 (U)ESP32-S3.38 (U)ESP32-S3.39 CP.7 ON/OFF.1 ON/OFF.4 ON/OFF.5 ON/OFF.6 TIA.1 TIA.5 TIA.8

## Polygon pours and split planes (outlines as drawn)
GND on Bottom Layer "GND_L-01_P-001" (solid, shelved, pour order 0): 7.28,2027.53 7.28,-392.47 3647.28,-392.47 3647.28,2027.53
no net on Top Layer "GND_L-01_P-001" (solid, pour order 10): 2240,900 2240,840 2300,840 2340,800 2340,780 2400,780 2400,840 2340,840 2320,860 2320,900
5V_CLEAN on Top Layer "GND_L-01_P-001" (solid, pour order 8): 820,1120 820,920 920,820 1080,820 840,1060 840,1120
GND on Top Layer "GND_L-01_P-001" (solid, pour order 7): 1140,1060 1140,300 1200,300 1200,420 1760,420 1760,860 1400,860 1200,1060
GND on Top Layer "GND_L-01_P-001" (solid, pour order 2): 1580,-20 1580,-280 1980,-280 1980,-20

## Other copper
Top Layer:
  text "GND" at 210,150 h60

## Silkscreen, mask and mechanical layers (free items; w line width, h text height)
Mechanical 1:
  the board outline again, w10